# EAGLE board Attempt1 (EAGLE 6.5.0)
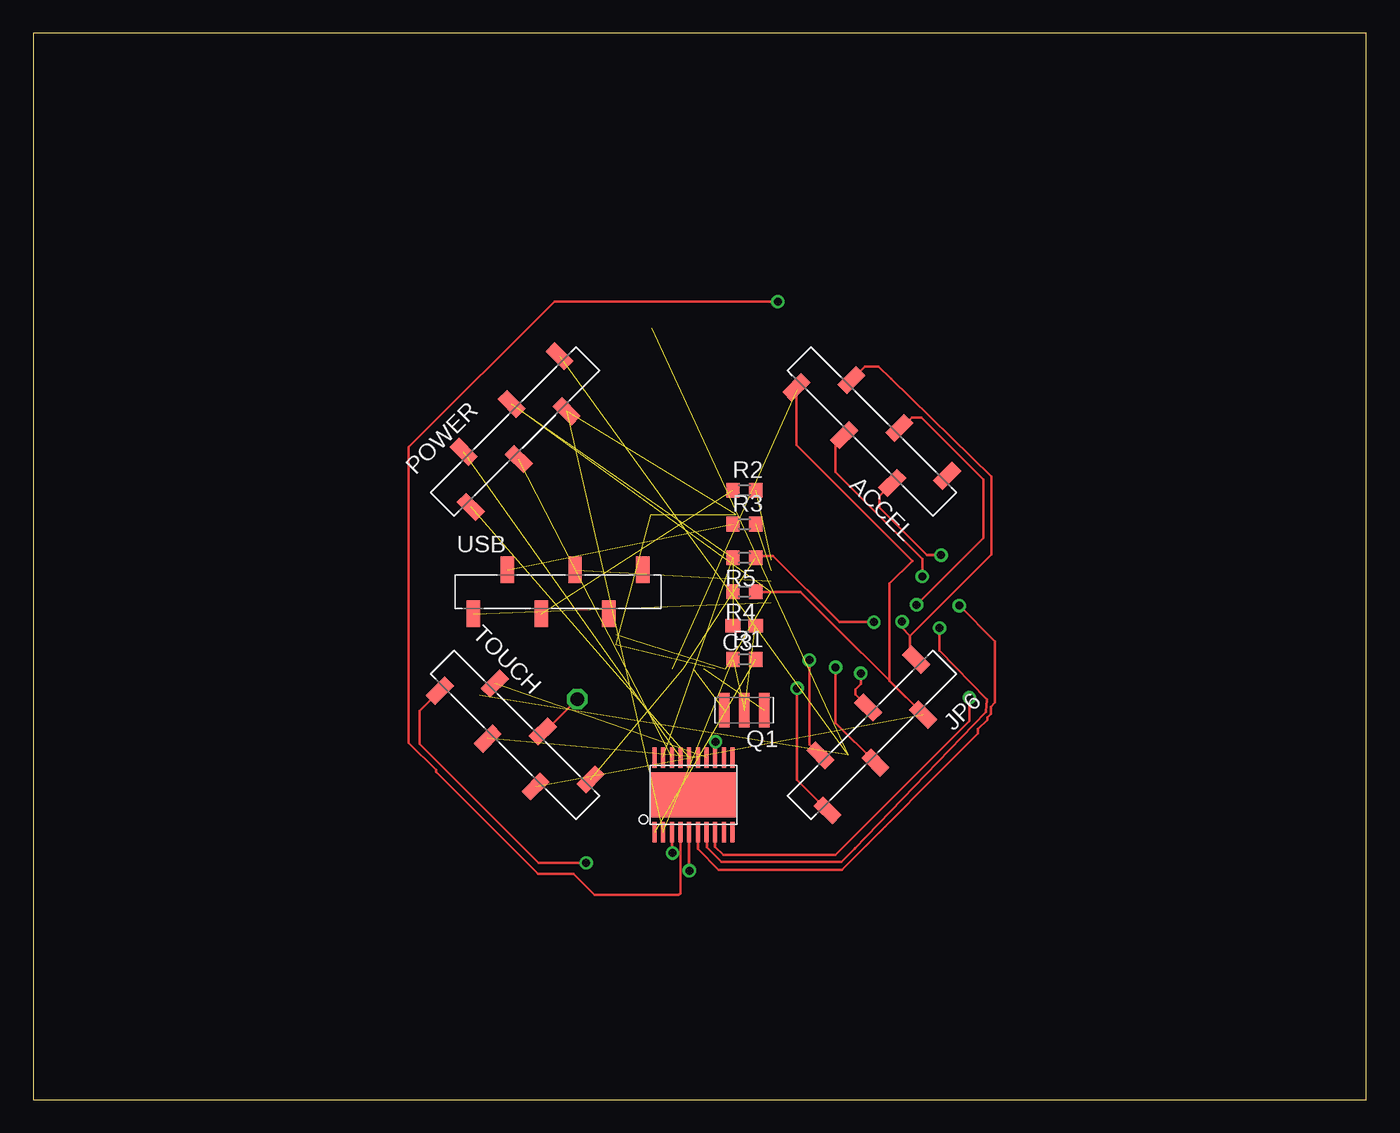
[diagram p0: board, top side]
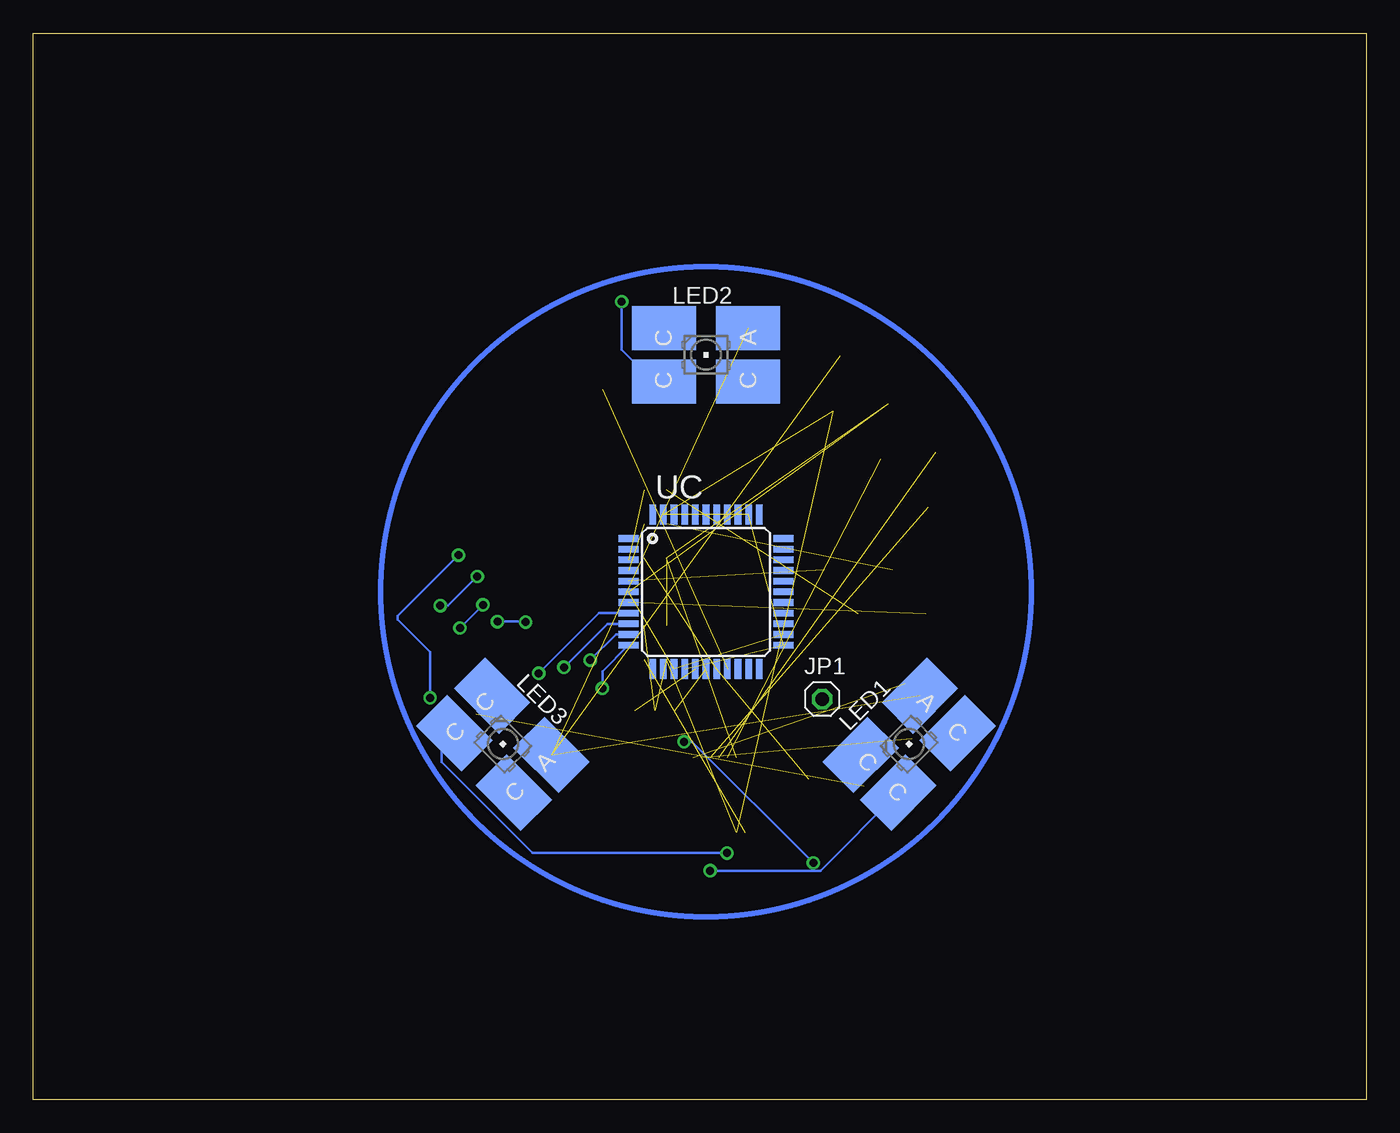
[diagram p1: board, bottom side, seen from below]

Size 100 x 80 mm. Coordinates in mm from the lower left corner, seen from the top.
Outline: 0,0 100,0 100,80 0,80 0,0
Copper layers (1*16): Top 0.035mm / dielectric 1.5mm / Bottom 0.035mm
Design rules "default": minimum track width 10mil, minimum drill 24mil, track to track 8mil, track to pad 8mil, pad to pad 8mil, via to via 8mil, smd to smd 8mil, copper to edge 40mil, drill to drill 8mil, minimum pad ring 10mil, minimum via ring 8mil, stop-mask expansion 4mil, vias tented up to drill 0mil, thermal gap 10mil

## Footprints (pad centres in the part's own frame; a part is rotated, then mirrored left to right if it is on the bottom)
1X06_SMD_STRAIGHT = smd 1 x 2: 1 0,1.65; 2 -2.54,-1.65; 3 -5.08,1.65; 4 -7.62,-1.65; 5 -10.16,1.65; 6 -12.7,-1.65
C0603 = smd 1.1 x 1: 1 -0.85,0; 2 0.85,0
HTSSOP20DAP = smd 0.3 x 1.55: 1 -2.925,-2.8; 2 -2.275,-2.8; 3 -1.625,-2.8; 4 -0.975,-2.8; 5 -0.325,-2.8; 6 0.325,-2.8; 7 0.975,-2.8; 8 1.625,-2.8; 9 2.275,-2.8; 10 2.925,-2.8; 11 2.925,2.8; 12 2.275,2.8; 13 1.625,2.8; 14 0.975,2.8; 15 0.325,2.8; 16 -0.325,2.8; 17 -0.975,2.8; 18 -1.625,2.8; 19 -2.275,2.8; 20 -2.925,2.8 | smd 6.5 x 3.4: EXP 0,0
1X01 = drill 1.016 octagon: 1 0,0
P-LCC-4 = smd 3.3 x 4.8: A -2,3.15; C@1 -2,-3.15; C@3 2,3.15; C@4 2,-3.15
CSTCR6M = smd 0.8 x 2.6: 1 -1.5,0; 2 0,0; 3 1.5,0
R0603 = smd 1 x 1.1: 1 -0.85,0; 2 0.85,0
TQFP44 = smd 1.5 x 0.5: 1 -5.8,4; 2 -5.8,3.2; 3 -5.8,2.4; 4 -5.8,1.6; 5 -5.8,0.8; 6 -5.8,0; 7 -5.8,-0.8; 8 -5.8,-1.6; 9 -5.8,-2.4; 10 -5.8,-3.2; 11 -5.8,-4; 23 5.8,-4; 24 5.8,-3.2; 25 5.8,-2.4; 26 5.8,-1.6; 27 5.8,-0.8; 28 5.8,0; 29 5.8,0.8; 30 5.8,1.6; 31 5.8,2.4; 32 5.8,3.2; 33 5.8,4 | smd 0.5 x 1.5: 12 -4,-5.8; 13 -3.2,-5.8; 14 -2.4,-5.8; 15 -1.6,-5.8; 16 -0.8,-5.8; 17 0,-5.8; 18 0.8,-5.8; 19 1.6,-5.8; 20 2.4,-5.8; 21 3.2,-5.8; 22 4,-5.8; 34 4,5.8; 35 3.2,5.8; 36 2.4,5.8; 37 1.6,5.8; 38 0.8,5.8; 39 0,5.8; 40 -0.8,5.8; 41 -1.6,5.8; 42 -2.4,5.8; 43 -3.2,5.8; 44 -4,5.8

## Placement (x,y rotation side)
ACCEL  [1X06_SMD_STRAIGHT]  58.42,54.61 135 top
C3  [C0603]  53.34,35.56 180 top
IC1  TLC59711  [HTSSOP20DAP]  49.53,22.86 0 top
JP1  [1X01]  40.82,30.05 0 bottom
JP6  [1X06_SMD_STRAIGHT]  58.42,22.86 225 top
LED1  [P-LCC-4]  34.29,26.67 315 bottom
LED2  [P-LCC-4]  49.53,55.88 270 bottom
LED3  [P-LCC-4]  64.77,26.67 225 bottom
POWER  [1X06_SMD_STRAIGHT]  40.64,54.61 45 top
Q1  CSTCR6M00G53Z  [CSTCR6M]  53.34,29.21 180 top
R1  827  [R0603]  53.34,33.02 0 top
R2  22  [R0603]  53.34,45.72 0 top
R3  22  [R0603]  53.34,43.18 0 top
R4  4.7k  [R0603]  53.34,38.1 180 top
R5  4.7k  [R0603]  53.34,40.64 180 top
TOUCH  [1X06_SMD_STRAIGHT]  40.64,22.86 315 top
UC  ATMEGA32U4-AU  [TQFP44]  49.53,38.1 0 bottom
USB  [1X06_SMD_STRAIGHT]  45.72,38.1 0 top

## Library data of the parts
ACCEL JP6 POWER TOUCH USB = SparkFun-Connectors
C3 = eagle-ltspice; SPICEMODEL: NONE; SPICEPREFIX: C
IC1 UC = adafruit
JP1 = pinhead
LED1-LED3 = led
Q1 = murata-filter; MPN: CSTCR6M00G53-R0; OC_FARNELL: 1170434; OC_NEWARK: 25M8759
R1-R5 = resistor

## Nets
N$1: C3.1 IC1.2 POWER.2 Q1.2 R1.1 UC.15 UC.23 UC.35 UC.43
N$2: IC1.1 R1.2
N$3: IC1.18 POWER.4
N$4: IC1.17 POWER.5
N$5: IC1.16 POWER.6
N$6: IC1.15 TOUCH.4
N$7: IC1.14 TOUCH.5
N$8: IC1.13 TOUCH.6
N$9: ACCEL.3 IC1.6
N$10: ACCEL.4 IC1.7
N$11: ACCEL.5 IC1.8
N$12: UC.7 USB.6
N$13: R2.2 UC.3
N$14: R3.2 UC.4
N$15: UC.5 USB.3
N$16: R2.1 USB.4
N$17: R3.1 USB.5
N$18: Q1.3 UC.17
N$19: Q1.1 UC.16
N$21: JP6.2 UC.10
N$23: JP6.3 UC.9
N$24: JP6.4 UC.8
N$25: IC1.3 LED3.C@4
N$26: IC1.4 LED2.C@4
N$27: IC1.5 LED1.C@4
N$28: LED1.A LED2.A LED3.A POWER.1
N$29: ACCEL.1 JP6.5 R4.1 TOUCH.2 UC.19
N$30: ACCEL.2 JP6.6 R5.1 TOUCH.1 UC.18
N$31: JP6.1 UC.11
N$33: JP1.1 TOUCH.3
N$35: C3.2 IC1.19 POWER.3 R4.2 R5.2 UC.6 UC.14 UC.24

## Tracks (layer width: path | path; a pad name or v marks a point on that pad's centre or on a via)
N$1  (8 unrouted)
N$2  (1 unrouted)
N$3  (1 unrouted)
N$4  (1 unrouted)
N$5  (1 unrouted)
N$6  (1 unrouted)
N$7  (1 unrouted)
N$8  (via drill 0.6)
  Top 0.203: IC1.13 51.16,26.82 v51.18,26.85 | v41.48,17.75 37.92,17.75 28.98,26.7 28.98,29.16 TOUCH.6
  Bottom 0.203: v51.18,26.85 50.57,26.85 v41.48,17.75
N$9  (via drill 0.6)
  Top 0.203: IC1.6 49.85,18.8 51.41,17.25 60.66,17.25 70.87,27.46 70.87,27.79 71.58,28.5 71.58,28.68 71.83,28.93 71.83,29.46 72.16,29.79 72.16,34.37 v69.47,37.06 | v66.7,39.24 66.7,40.56 60.2,47.07 60.2,49.2 ACCEL.3
  Bottom 0.203: v69.47,37.06 68.89,37.06 v66.7,39.24
N$10  (via drill 0.6)
  Top 0.203: ACCEL.4 65.15,50.39 65.91,51.16 66.65,51.16 71.3,46.51 71.3,42.14 v66.27,37.11 | v68,35.38 68,33.71 71.53,30.02 71.45,29.08 61.59,18.82 61.67,18.87 60.63,17.83 51.64,17.83 50.55,18.92 50.55,20.02 IC1.7 50.52,20.04
  Bottom 0.203: v66.27,37.11 v68,35.38
N$11  (via drill 0.6)
  Top 0.203: IC1.8 51.16,18.97 51.77,18.36 60.17,18.36 70.23,28.42 v70.23,30.15 | v68.1,40.84 67.06,40.84 63.48,44.42 63.48,45.3 ACCEL.5
  Bottom 0.203: v70.23,30.15 70.23,33.58 72.67,36.02 72.67,36.27 v68.1,40.84
N$12  (1 unrouted)
N$13  (1 unrouted)
N$14  (1 unrouted)
N$15  (1 unrouted)
N$16  (1 unrouted)
N$17  (1 unrouted)
N$18  (1 unrouted)
N$19  (1 unrouted)
N$21  (via drill 0.6)
  Top 0.203: v58.22,32.97 58.22,26.66 JP6.2
  Bottom 0.203: UC.10 56.29,34.9 v58.22,32.97
N$23  (via drill 0.6)
  Top 0.203: v60.2,32.44 60.2,28.27 JP6.3
  Bottom 0.203: UC.9 56.93,35.7 v60.2,32.44
N$24  (via drill 0.6)
  Top 0.203: v62.08,31.98 62.08,31.19 61.67,30.79 61.67,30.39 JP6.4
  Bottom 0.203: UC.8 57.56,36.5 v62.08,31.98
N$25  (via drill 0.6)
  Top 0.203: IC1.3 47.91,18.54 v47.95,18.49
  Bottom 0.203: v47.95,18.49 62.53,18.49 69.37,25.32 69.37,26.53 LED3.C@4
N$26  (via drill 0.6)
  Top 0.203: IC1.4 48.55,15.48 48.41,15.34 42.11,15.34 40.51,16.94 37.87,16.94 30.23,24.59 30.23,24.71 28.17,26.77 28.17,48.95 39.09,59.87 v55.85,59.87
  Bottom 0.203: v55.85,59.87 55.85,56.29 53.59,54.03 52.83,54.03 LED2.C@4
N$27  (via drill 0.6)
  Top 0.203: IC1.5 49.2,17.19 v49.23,17.17
  Bottom 0.203: v49.23,17.17 40.96,17.17 LED1.C@4
N$28  (3 unrouted)
N$29  (2 unrouted)
  Top 0.203: R4.1 57.55,38.1 JP6.5 64.24,31.41 64.24,38.71 65.94,40.41 57.25,49.1 ACCEL.1 57.28,53.42 57.28,53.26
N$30  (via drill 0.6)  (2 unrouted)
  Top 0.203: 65.79,34.8 71.88,40.89 71.88,46.74 64.33,54.08 63.42,54.99 62.39,54.99 ACCEL.2 | 65.79,34.8 65.79,33.45 | 65.79,34.8 65.18,35.41 v65.18,35.87 | v63.07,35.81 60.48,35.81 55.5,40.79 54.34,40.79 R5.1
  Top 0.406: 65.79,33.45 JP6.6
  Bottom 0.203: v65.18,35.87 63.12,35.87 v63.07,35.81
N$31  (via drill 0.6)
  Top 0.203: v57.3,30.86 57.3,23.98 JP6.1
  Bottom 0.203: UC.11 57.3,32.13 v57.3,30.86
N$33
  Top 0.203: TOUCH.3 38.39,27.62 JP1.1
N$35  (7 unrouted)
(copper drawn outside any net)
  shapes: Bottom circle x1